# Altium PCB PCB4.PcbDoc (part 1 of 7)
Units mm, origin at the board's own origin, x right, y up, seen from the top; angles counter-clockwise.
Board outline 234.9 x 198.3 mm, 4 copper layers (Top Layer, Signal Layer 2, Mid, Bottom Layer), stack 3.052 mm thick; 410 components, 320 nets, 2032 pads, 297 vias.
Unrouted connection lines stored in the file: 1.
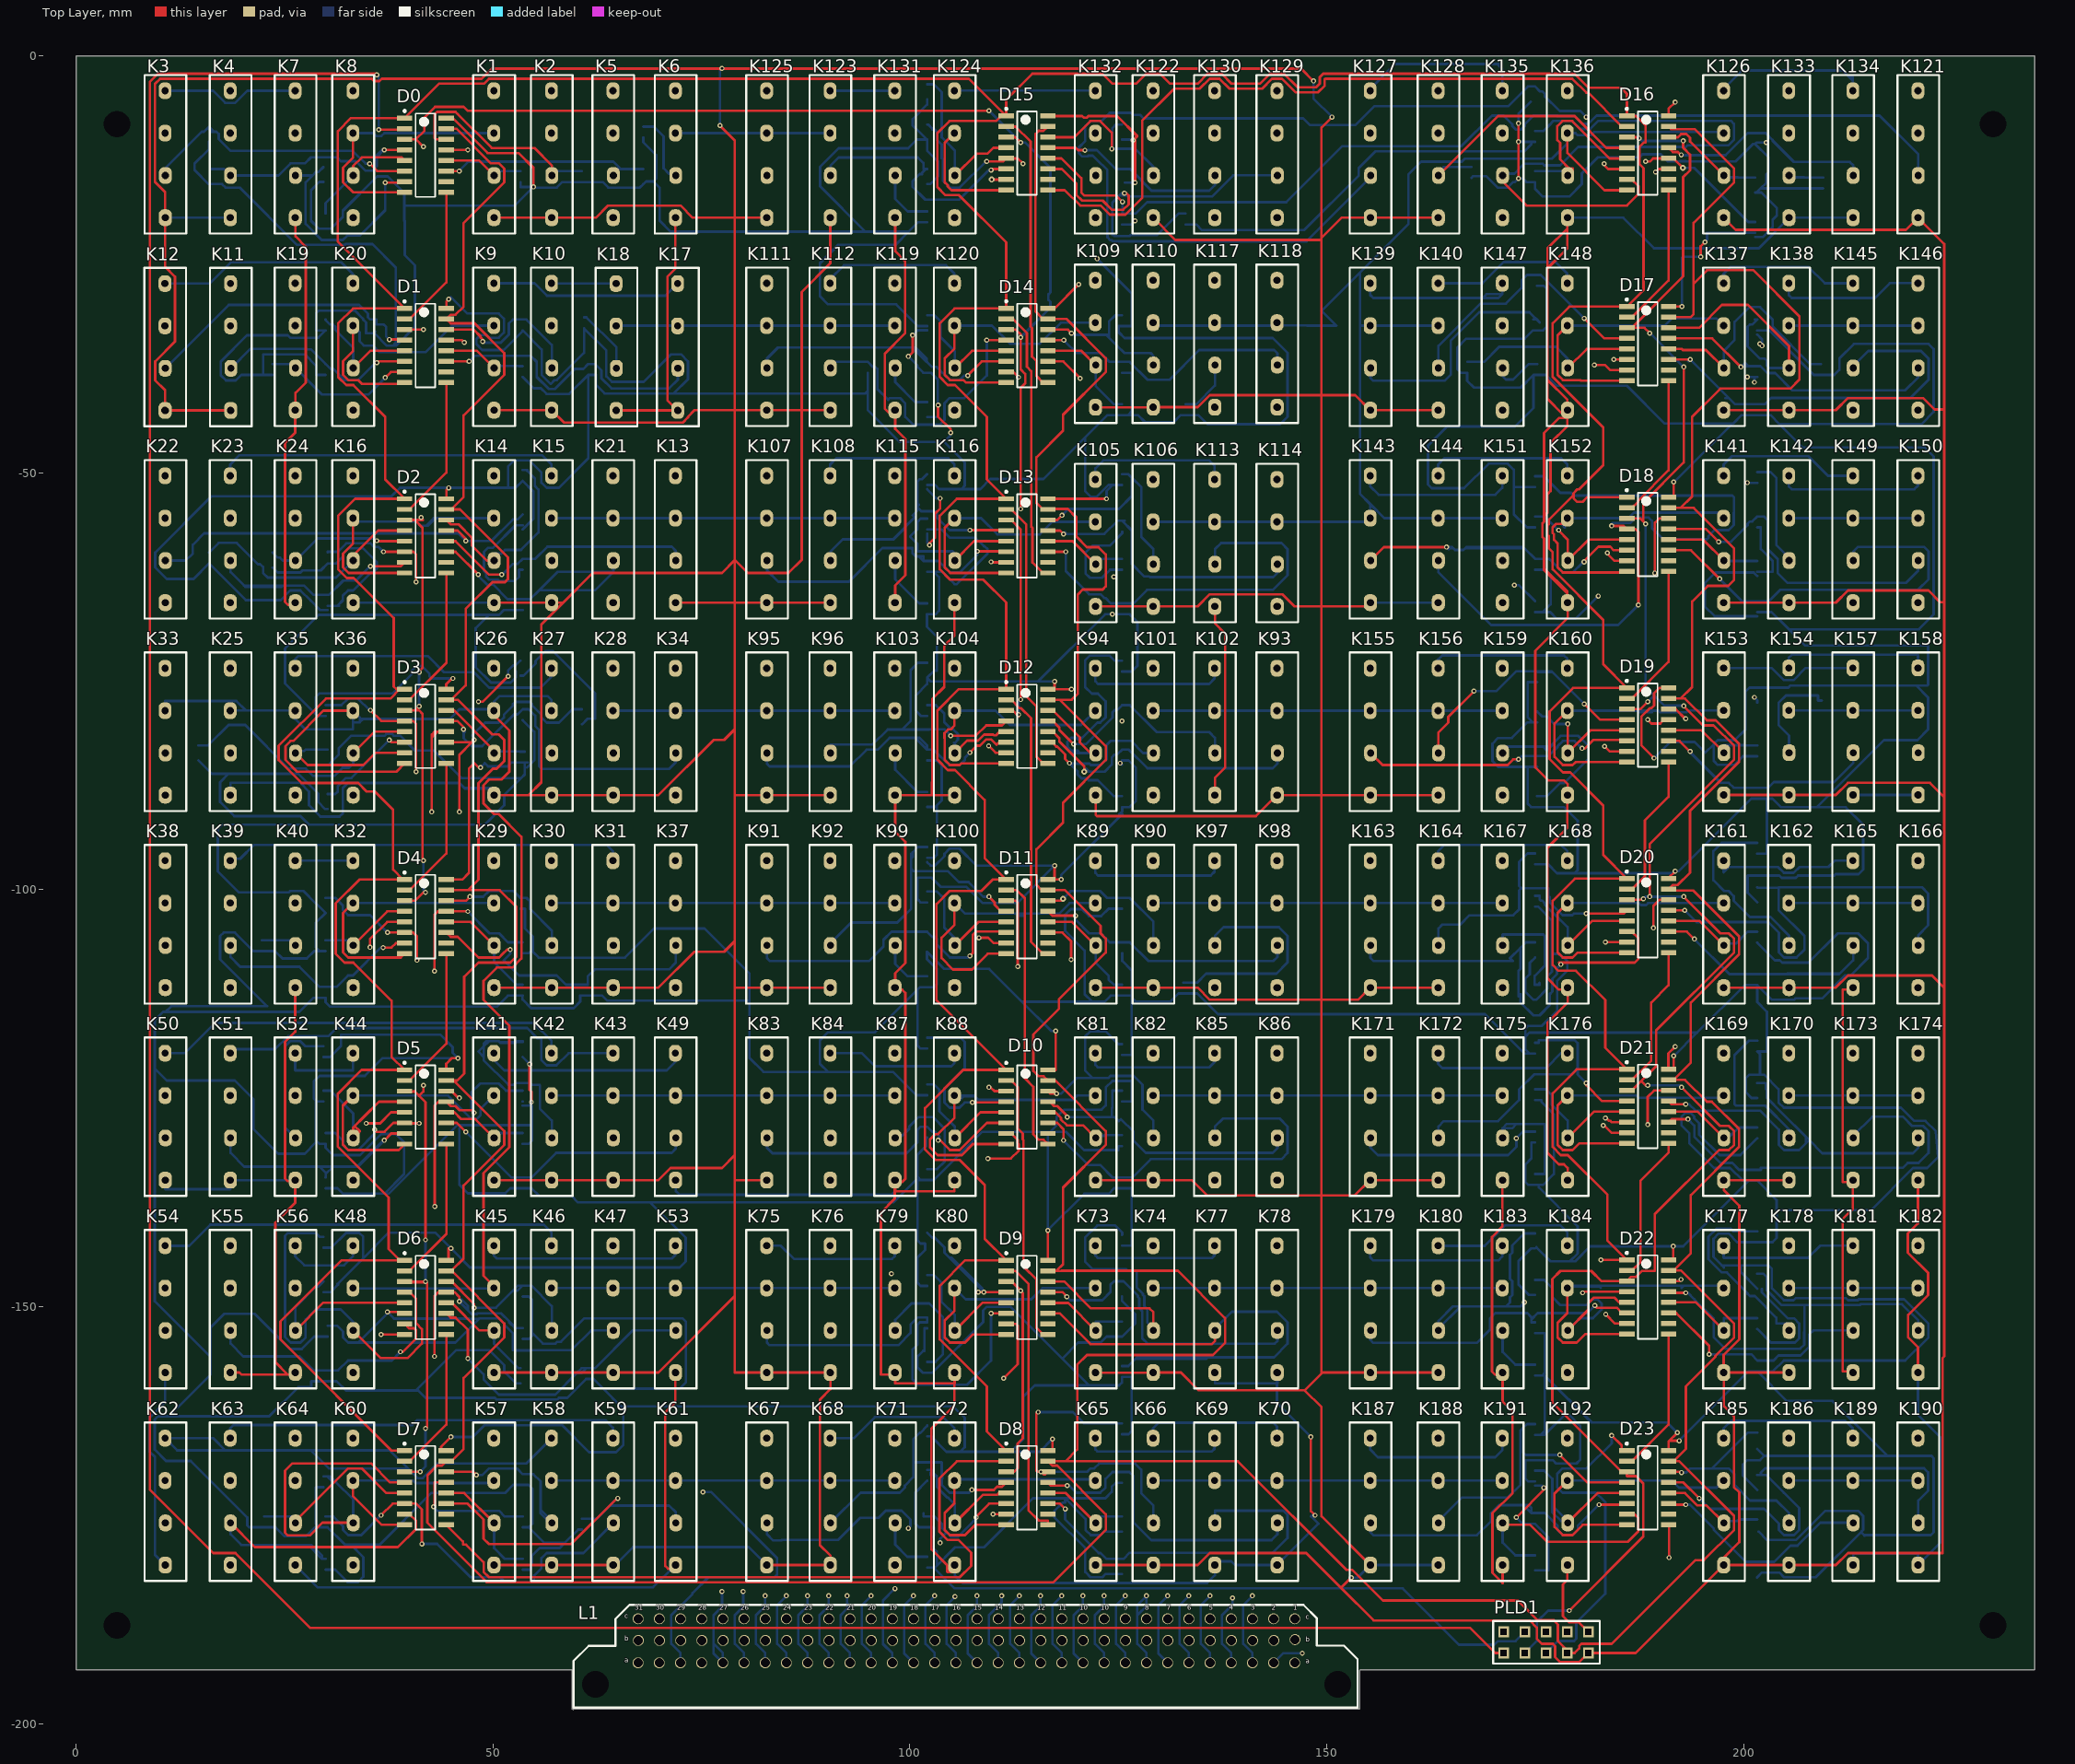
[diagram p0: Top Layer view]
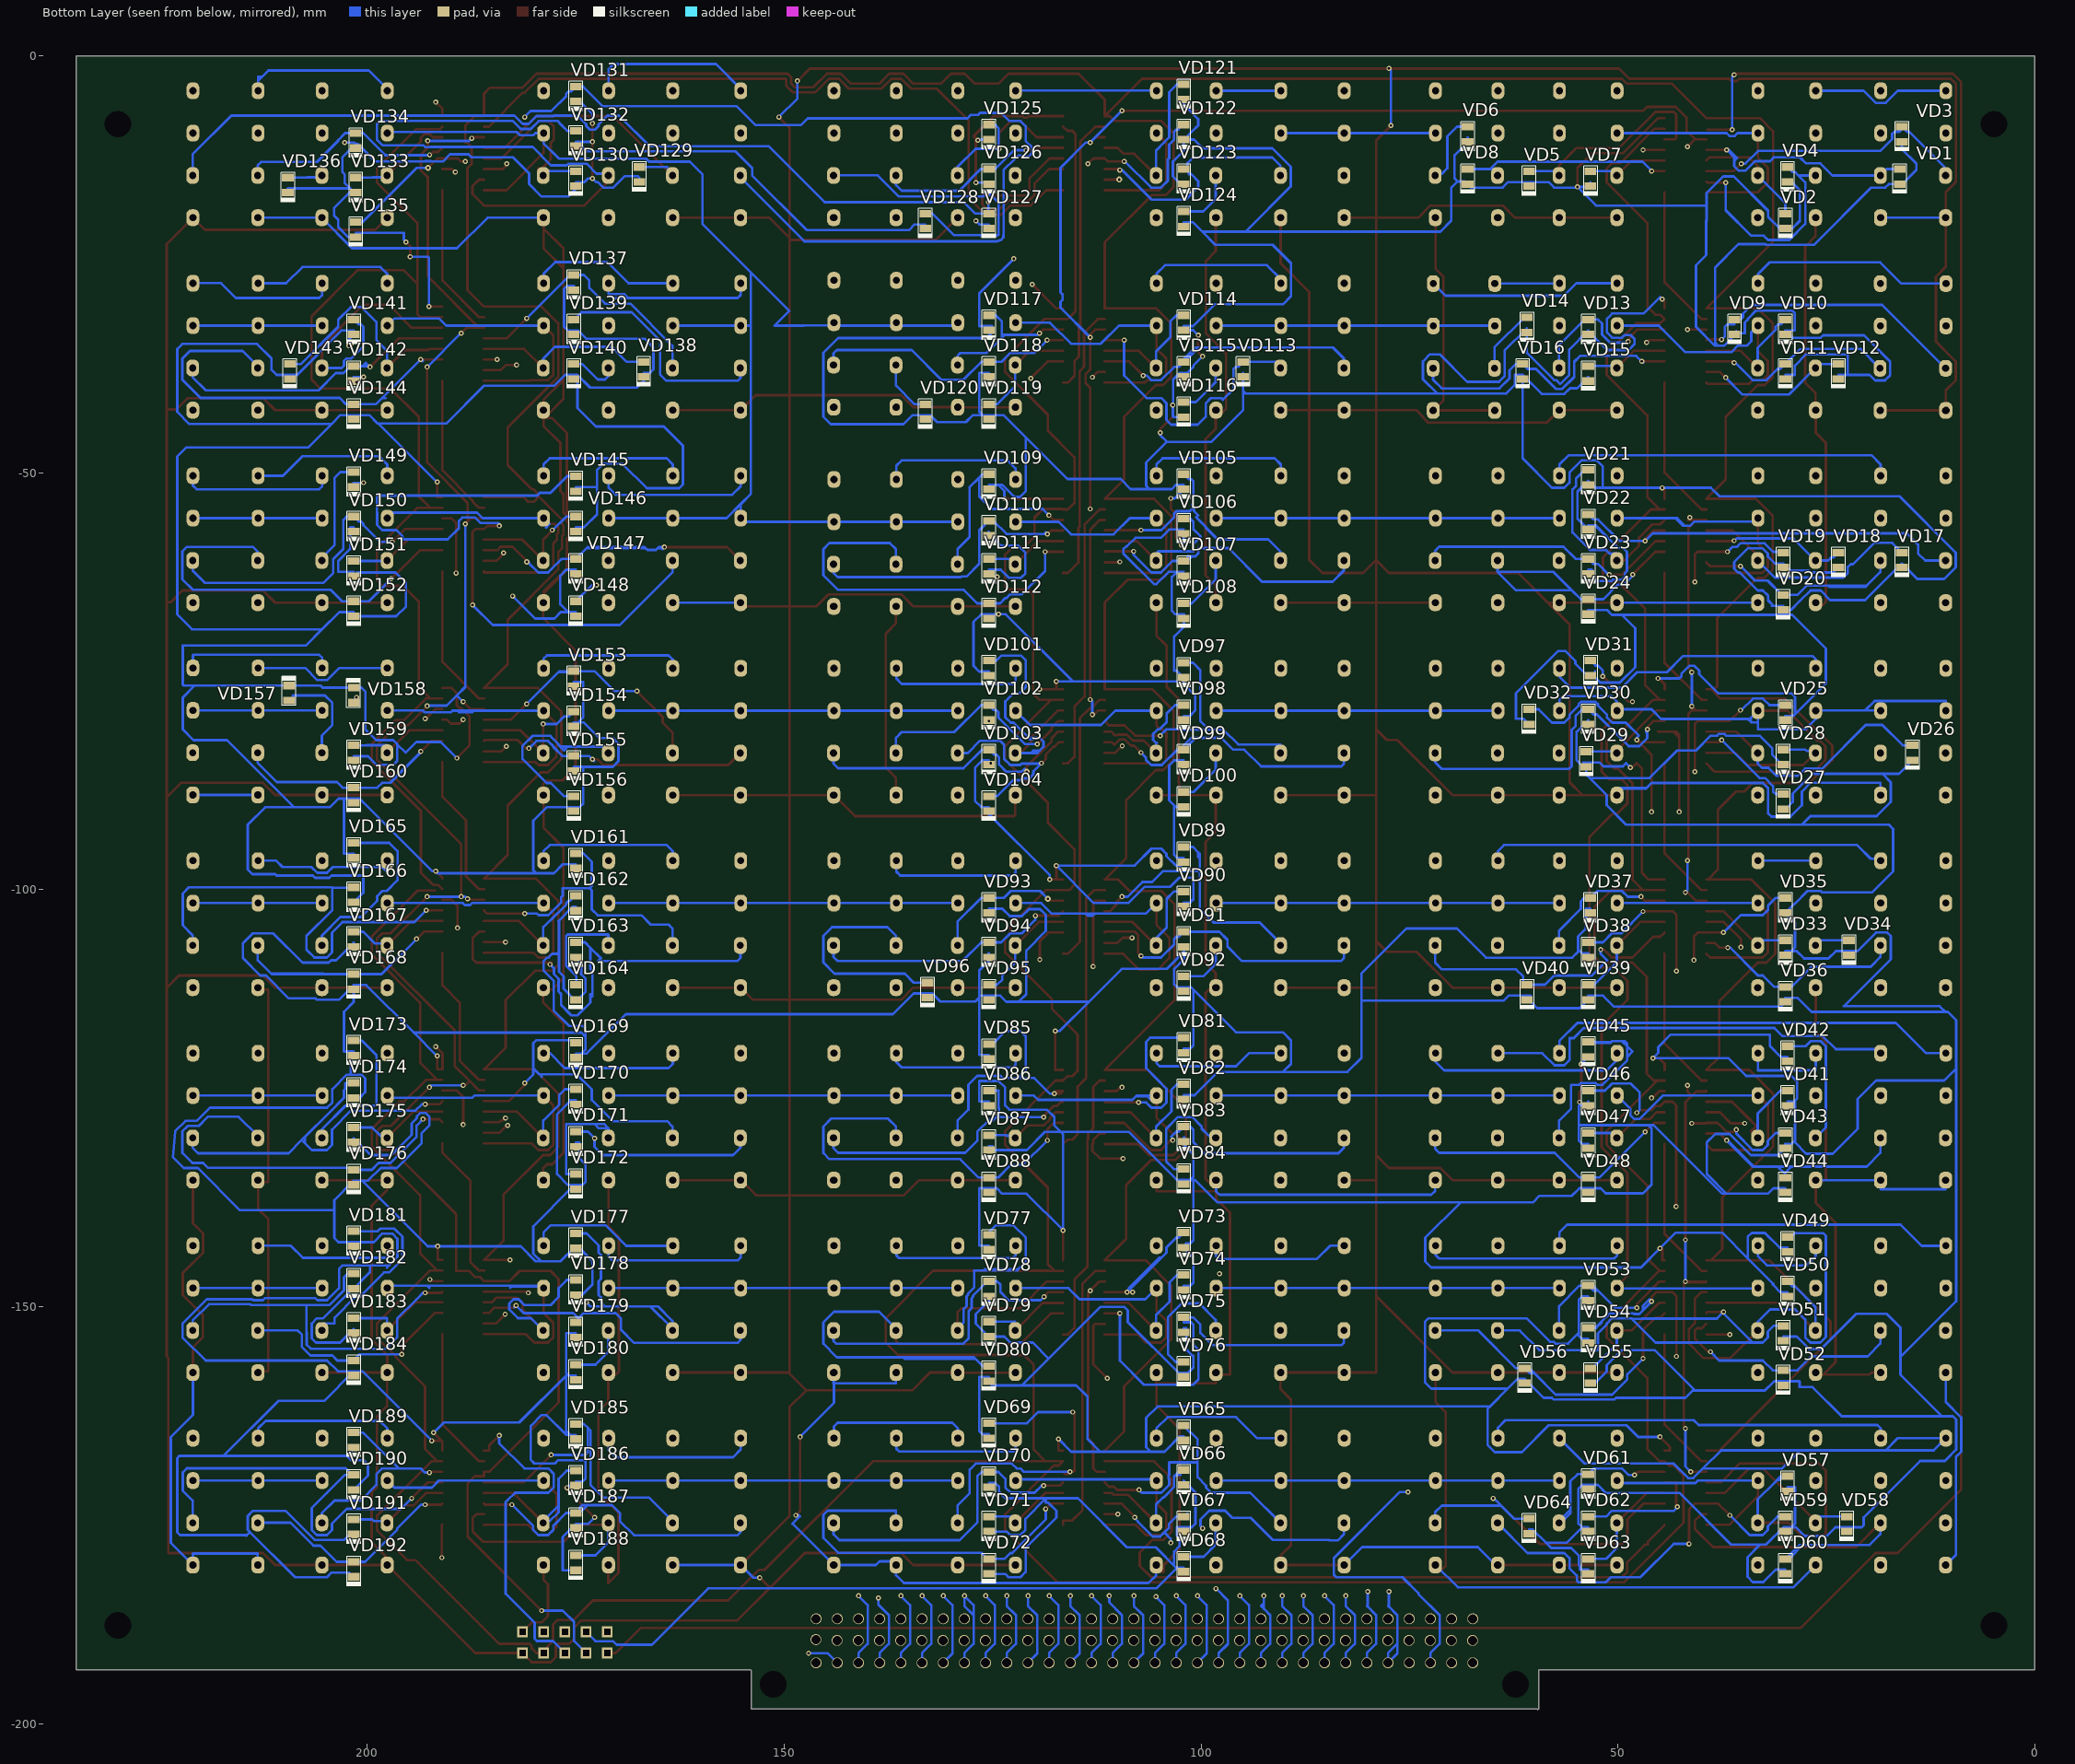
[diagram p1: Bottom Layer view, seen from below]
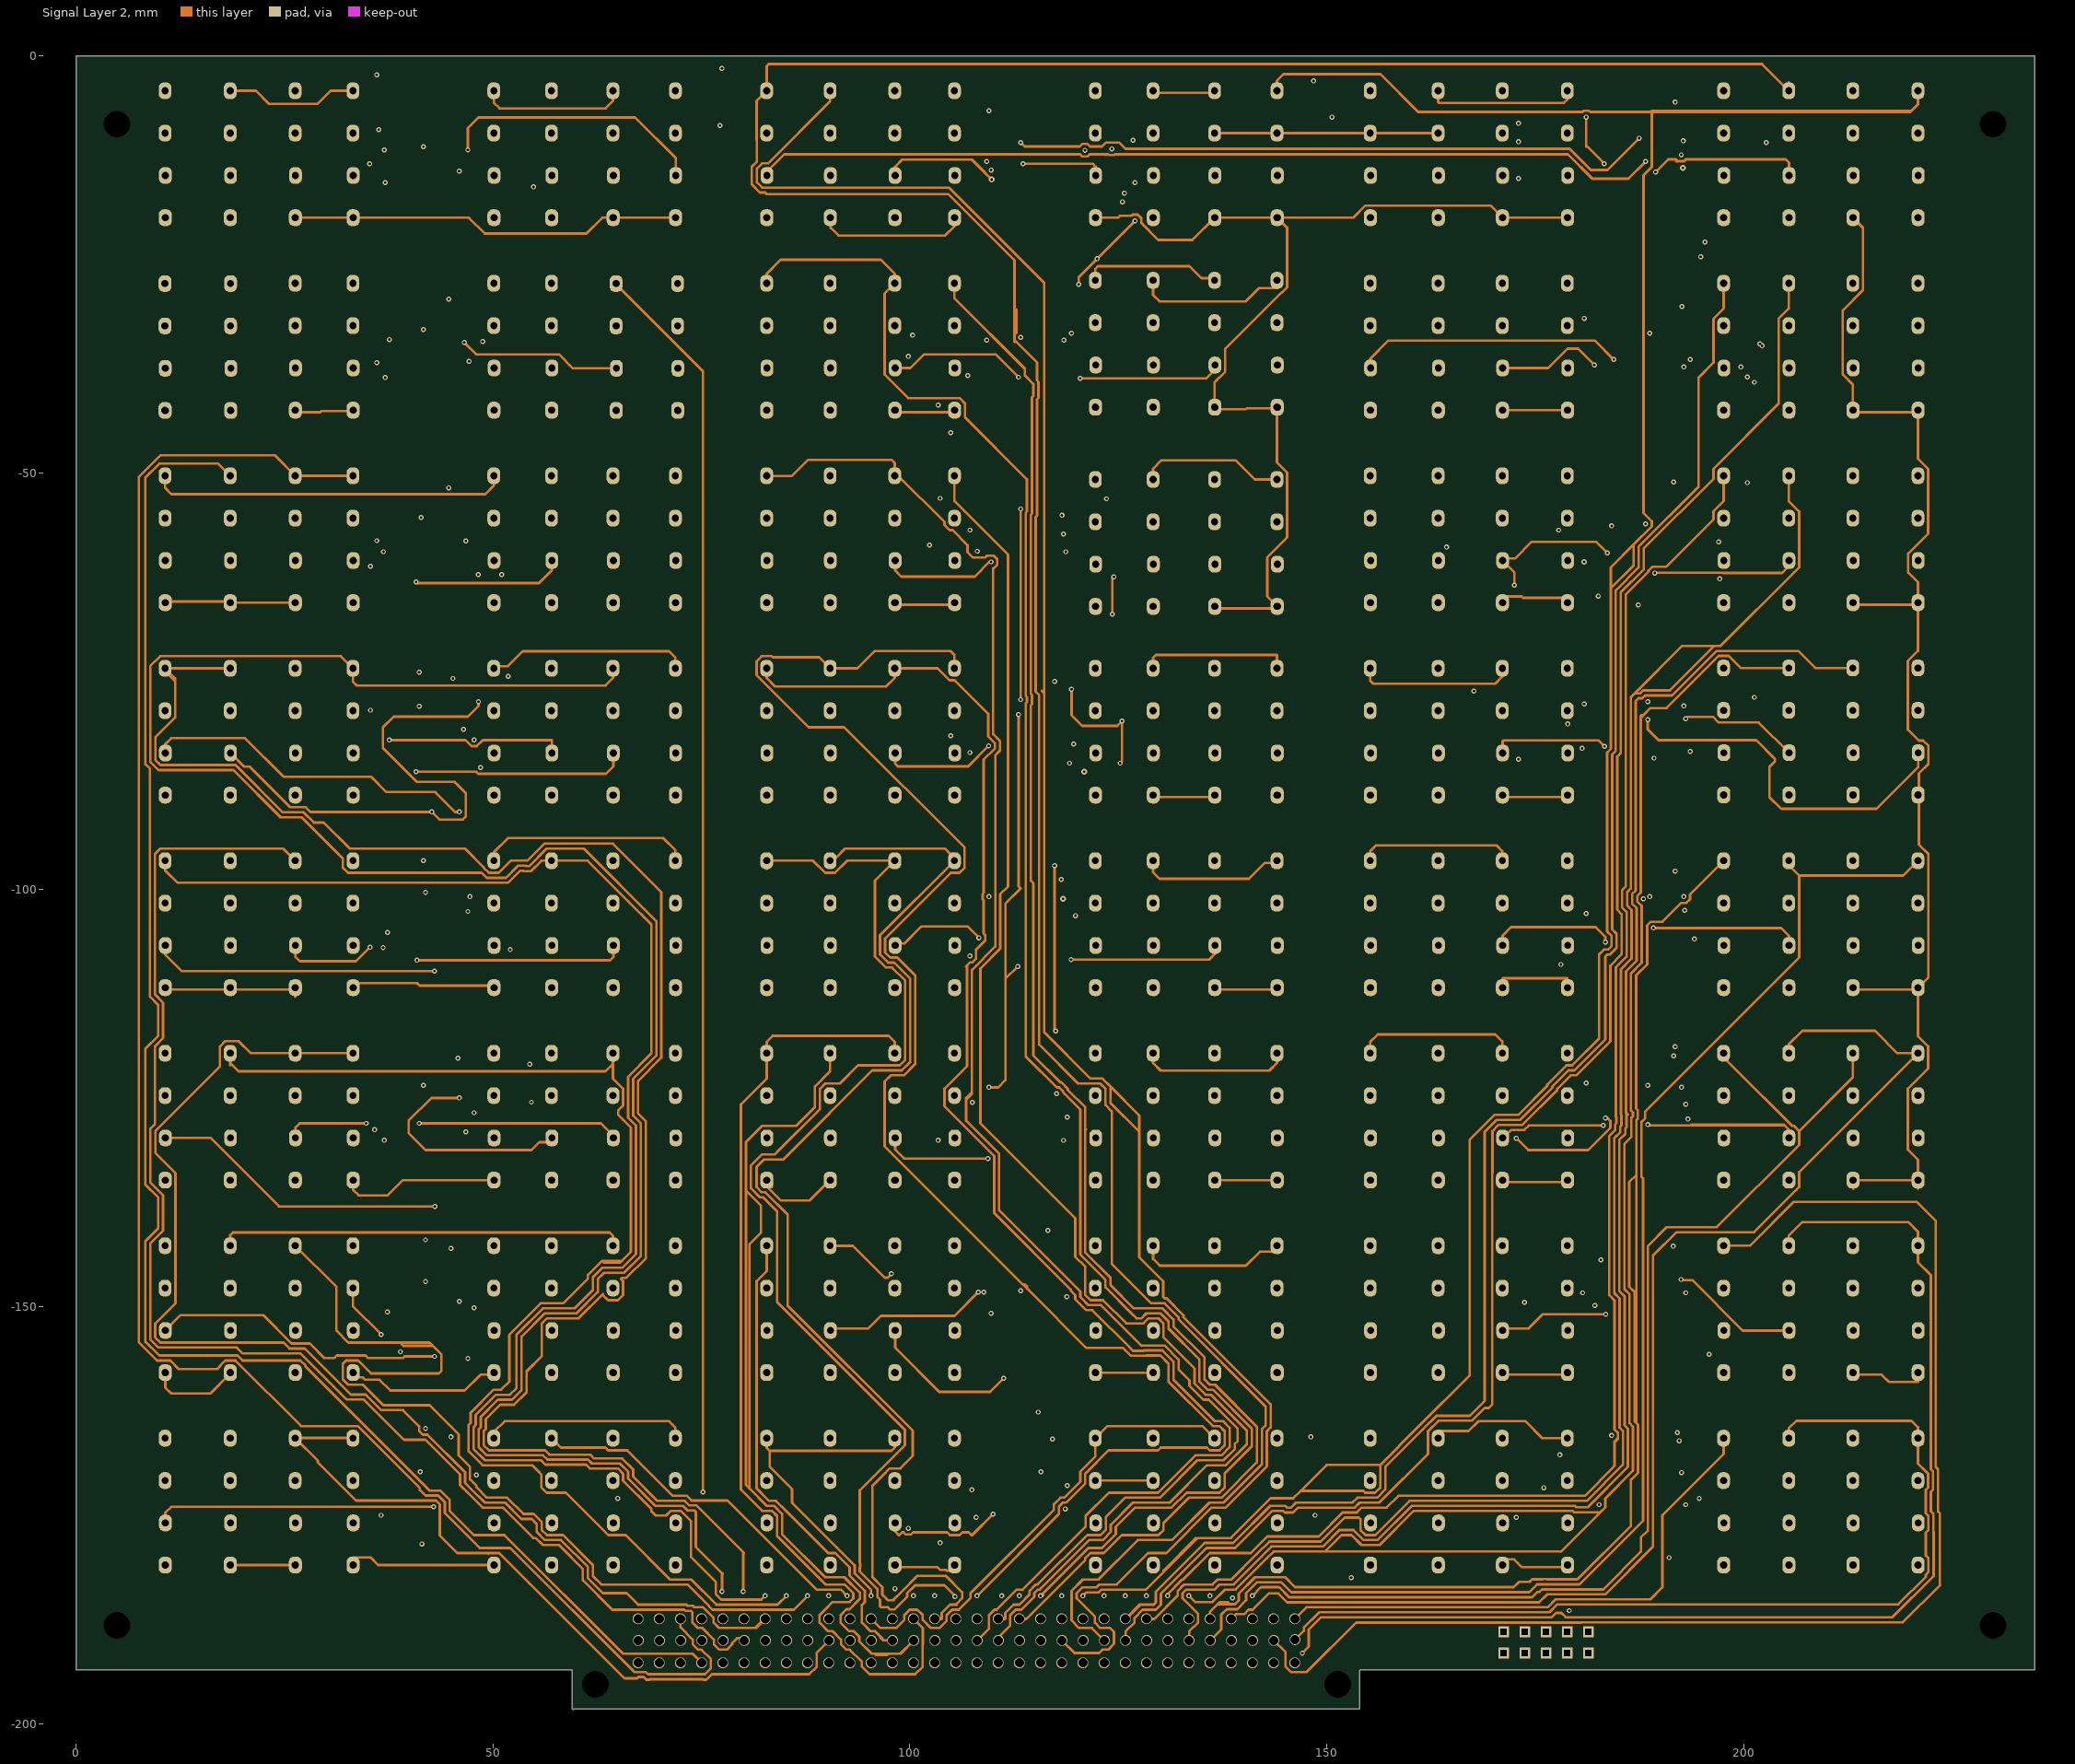
[diagram p2: Signal Layer 2]
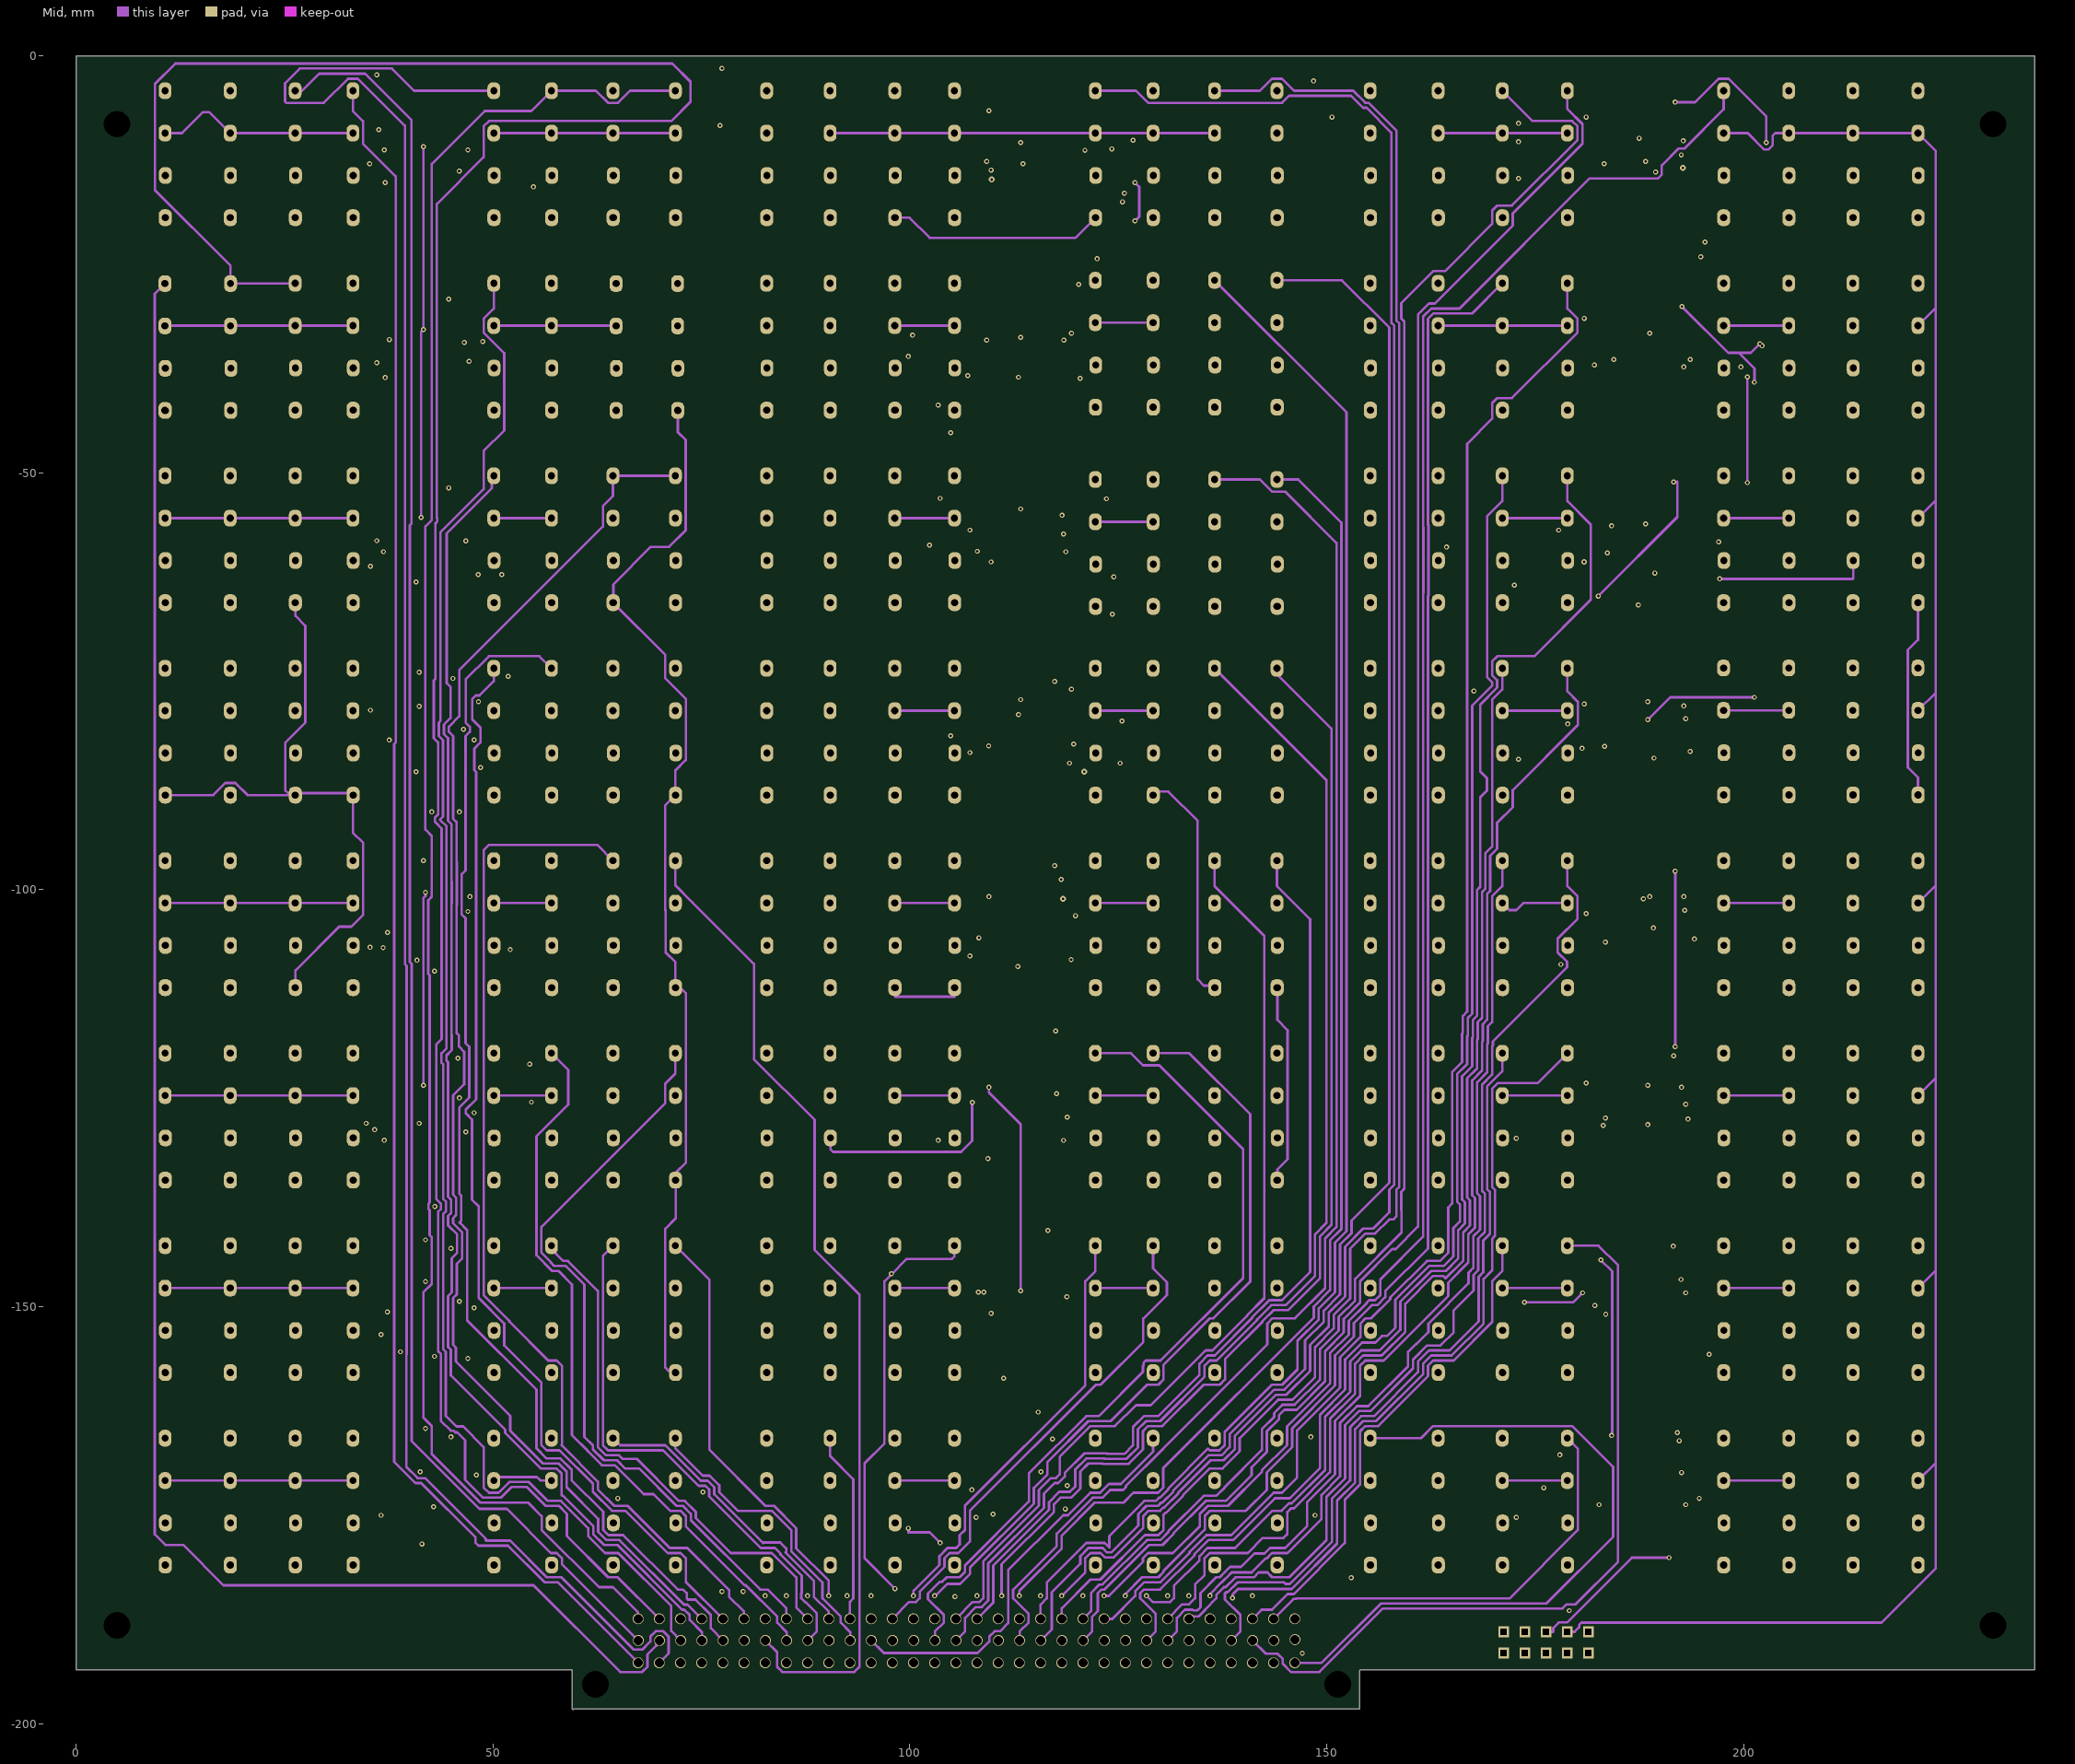
[diagram p3: Mid]

## Layer stack, top to bottom
Top Solder: solder mask 0.0102, Solder Resist, Dk 3.5
Top Layer: signal copper 0.036
Dielectric 1: core 0.8, FR-4 DE 104 ML, Dk 4.2
Dielectric 4: prepreg 0.127, Prepreg 2116PL03, Dk 4.2
Dielectric 6: prepreg 0.127, Prepreg 2116PL03, Dk 4.2
Signal Layer 2: signal copper 0.036
Dielectric 5: core 0.8, FR-4 DE 104 ML, Dk 4.2
Mid: signal copper 0.036
Dielectric 7: prepreg 0.127, Prepreg 2116PL03, Dk 4.2
Dielectric 8: prepreg 0.127, Prepreg 2116PL03, Dk 4.2
Dielectric 2: core 0.8, FR-4 DE 104 ML, Dk 4.2
Bottom Layer: signal copper 0.036
Bottom Solder: solder mask 0.0102, Solder Resist, Dk 3.5

## Board outline
0,-193.5 59.5,-193.5 59.5,-198.2 59.6,-198.3 59.7,-198.2 153.9,-198.2 153.9,-193.6 154,-193.5 234.9,-193.5 234.9,0 0,0

## Design rules (kind name [scope] priority, off if disabled: settings)
Clearance [All] p1: gap=0.3
PolygonConnect [All] p1: connectstyle=Relief reliefconductorwidth=0.254 reliefentries=4 polygonreliefangle="90 Angle" airgapwidth=0.254
RoutingCorners [All] p1: cornerstyle=45-Degree minsetback=3 maxsetback=3
RoutingVias [All] p1: holewidth=0.3 width=0.6 viastyle="Through Hole" minholewidth=0.3 minwidth=0.6 maxholewidth=0.3 maxwidth=0.6
SolderMaskExpansion [All] p1: expansion=0.002
Width [All] p1: maxlimit=0.3 minlimit=0.3 preferedwidth=0.3
28 further rules are at their usual default settings.

## Components (designator, comment, footprint, x,y, rotation, side; value= is the part's Value field where it differs from the comment)
D0 "" SOP127P600X175-16N 41.908,-11.921 r0 top
D1 "" SOP127P600X175-16N 41.907,-34.744 r0 top
D2 "" SOP127P600X175-16N 41.908,-57.568 r0 top
D3 "" SOP127P600X175-16N 41.908,-80.392 r0 top
D4 "" SOP127P600X175-16N 41.908,-103.215 r0 top
D5 "" SOP127P600X175-16N 41.908,-126.039 r0 top
D6 "" SOP127P600X175-16N 41.908,-148.863 r0 top
D7 "" SOP127P600X175-16N 41.908,-171.687 r0 top
D8 "" SOP127P600X175-16N 114.043,-171.687 r0 top
D9 "" SOP127P600X175-16N 114.043,-148.863 r0 top
D10 "" SOP127P600X175-16N 114.043,-126.039 r0 top
D11 "" SOP127P600X175-16N 114.043,-103.215 r0 top
D12 "" SOP127P600X175-16N 114.043,-80.392 r0 top
D13 "" SOP127P600X175-16N 114.043,-57.568 r0 top
D14 "" SOP127P600X175-16N 114.043,-34.744 r0 top
D15 "" SOP127P600X175-16N 114.043,-11.667 r0 top
D16 "" SOP127P600X175-16N 188.466,-11.667 r0 top
D17 "" SOP127P600X175-16N 188.466,-34.527 r0 top
D18 "" SOP127P600X175-16N 188.466,-57.387 r0 top
D19 "" SOP127P600X175-16N 188.466,-80.247 r0 top
D20 "" SOP127P600X175-16N 188.466,-103.107 r0 top
D21 "" SOP127P600X175-16N 188.466,-125.966 r0 top
D22 "" SOP127P600X175-16N 188.466,-148.827 r0 top
D23 "" SOP127P600X175-16N 188.466,-171.687 r0 top
K1 "" TTR-реле 52.639,-21.319 r90 top
K2 "" TTR-реле 59.561,-21.319 r90 top
K3 "" TTR-реле 13.221,-21.319 r90 top
K4 "" TTR-реле 21.031,-21.319 r90 top
K5 "" TTR-реле 66.935,-21.319 r90 top
K6 "" TTR-реле 74.419,-21.319 r90 top
K7 "" TTR-реле 28.827,-21.319 r90 top
K8 "" TTR-реле 35.748,-21.319 r90 top
K9 "" TTR-реле 52.639,-44.396 r90 top
K10 "" TTR-реле 59.561,-44.396 r90 top
K11 "" TTR-реле 21.08,-44.433 r90 top
K12 "" TTR-реле 13.206,-44.433 r90 top
K13 "" TTR-реле 74.419,-67.474 r90 top
K14 "" TTR-реле 52.639,-67.474 r90 top
K15 "" TTR-реле 59.561,-67.474 r90 top
K16 "" TTR-реле 35.748,-67.474 r90 top
K17 "" TTR-реле 74.674,-44.433 r90 top
K18 "" TTR-реле 67.308,-44.433 r90 top
K19 "" TTR-реле 28.827,-44.396 r90 top
K20 "" TTR-реле 35.748,-44.396 r90 top
K21 "" TTR-реле 66.935,-67.474 r90 top
K22 "" TTR-реле 13.221,-67.474 r90 top
K23 "" TTR-реле 21.031,-67.474 r90 top
K24 "" TTR-реле 28.827,-67.474 r90 top
K25 "" TTR-реле 21.031,-90.552 r90 top
K26 "" TTR-реле 52.639,-90.552 r90 top
K27 "" TTR-реле 59.56,-90.552 r90 top
K28 "" TTR-реле 66.935,-90.552 r90 top
K29 "" TTR-реле 52.639,-113.629 r90 top
K30 "" TTR-реле 59.561,-113.629 r90 top
K31 "" TTR-реле 66.935,-113.629 r90 top
K32 "" TTR-реле 35.748,-113.629 r90 top
K33 "" TTR-реле 13.221,-90.552 r90 top
K34 "" TTR-реле 74.42,-90.552 r90 top
K35 "" TTR-реле 28.827,-90.552 r90 top
K36 "" TTR-реле 35.748,-90.552 r90 top
K37 "" TTR-реле 74.42,-113.629 r90 top
K38 "" TTR-реле 13.221,-113.629 r90 top
K39 "" TTR-реле 21.031,-113.629 r90 top
K40 "" TTR-реле 28.827,-113.629 r90 top
K41 "" TTR-реле 52.639,-136.707 r90 top
K42 "" TTR-реле 59.561,-136.707 r90 top
K43 "" TTR-реле 66.935,-136.707 r90 top
K44 "" TTR-реле 35.748,-136.707 r90 top
K45 "" TTR-реле 52.639,-159.785 r90 top
K46 "" TTR-реле 59.561,-159.785 r90 top
K47 "" TTR-реле 66.935,-159.785 r90 top
K48 "" TTR-реле 35.748,-159.785 r90 top
K49 "" TTR-реле 74.42,-136.707 r90 top
K50 "" TTR-реле 13.221,-136.707 r90 top
K51 "" TTR-реле 21.031,-136.707 r90 top
K52 "" TTR-реле 28.827,-136.707 r90 top
K53 "" TTR-реле 74.42,-159.785 r90 top
K54 "" TTR-реле 13.221,-159.785 r90 top
K55 "" TTR-реле 21.031,-159.785 r90 top
K56 "" TTR-реле 28.827,-159.785 r90 top
K57 "" TTR-реле 52.639,-182.863 r90 top
K58 "" TTR-реле 59.561,-182.863 r90 top
K59 "" TTR-реле 66.935,-182.863 r90 top
K60 "" TTR-реле 35.748,-182.863 r90 top
K61 "" TTR-реле 74.42,-182.863 r90 top
K62 "" TTR-реле 13.221,-182.863 r90 top
K63 "" TTR-реле 21.031,-182.863 r90 top
K64 "" TTR-реле 28.827,-182.863 r90 top
K65 "" TTR-реле 124.775,-182.863 r90 top
K66 "" TTR-реле 131.697,-182.863 r90 top
K67 "" TTR-реле 85.357,-182.863 r90 top
K68 "" TTR-реле 92.962,-182.863 r90 top
K69 "" TTR-реле 139.071,-182.863 r90 top
K70 "" TTR-реле 146.556,-182.863 r90 top
K71 "" TTR-реле 100.723,-182.863 r90 top
K72 "" TTR-реле 107.884,-182.863 r90 top
K73 "" TTR-реле 124.775,-159.785 r90 top
K74 "" TTR-реле 131.697,-159.785 r90 top
K75 "" TTR-реле 85.357,-159.785 r90 top
K76 "" TTR-реле 92.962,-159.785 r90 top
K77 "" TTR-реле 139.071,-159.785 r90 top
K78 "" TTR-реле 146.556,-159.785 r90 top
K79 "" TTR-реле 100.723,-159.785 r90 top
K80 "" TTR-реле 107.884,-159.785 r90 top
K81 "" TTR-реле 124.775,-136.707 r90 top
K82 "" TTR-реле 131.697,-136.707 r90 top
K83 "" TTR-реле 85.357,-136.707 r90 top
K84 "" TTR-реле 92.962,-136.707 r90 top
K85 "" TTR-реле 139.071,-136.707 r90 top
K86 "" TTR-реле 146.556,-136.707 r90 top
K87 "" TTR-реле 100.723,-136.707 r90 top
K88 "" TTR-реле 107.884,-136.707 r90 top
K89 "" TTR-реле 124.775,-113.629 r90 top
K90 "" TTR-реле 131.697,-113.629 r90 top
K91 "" TTR-реле 85.357,-113.629 r90 top
K92 "" TTR-реле 92.962,-113.629 r90 top
K93 "" TTR-реле 146.556,-90.552 r90 top
K94 "" TTR-реле 124.775,-90.552 r90 top
K95 "" TTR-реле 85.357,-90.552 r90 top
K96 "" TTR-реле 92.962,-90.552 r90 top
K97 "" TTR-реле 139.071,-113.629 r90 top
K98 "" TTR-реле 146.556,-113.629 r90 top
K99 "" TTR-реле 100.723,-113.629 r90 top
K100 "" TTR-реле 107.884,-113.629 r90 top
K101 "" TTR-реле 131.697,-90.552 r90 top
K102 "" TTR-реле 139.071,-90.552 r90 top
K103 "" TTR-реле 100.723,-90.552 r90 top
K104 "" TTR-реле 107.884,-90.552 r90 top
K105 "" TTR-реле 124.775,-67.92 r90 top
K106 "" TTR-реле 131.697,-67.92 r90 top
K107 "" TTR-реле 85.357,-67.474 r90 top
K108 "" TTR-реле 92.962,-67.474 r90 top
K109 "" TTR-реле 124.775,-44.044 r90 top
K110 "" TTR-реле 131.697,-44.044 r90 top
K111 "" TTR-реле 85.357,-44.396 r90 top
K112 "" TTR-реле 92.962,-44.396 r90 top
K113 "" TTR-реле 139.071,-67.92 r90 top
K114 "" TTR-реле 146.556,-67.92 r90 top
K115 "" TTR-реле 100.723,-67.474 r90 top
K116 "" TTR-реле 107.884,-67.474 r90 top
K117 "" TTR-реле 139.071,-44.044 r90 top
K118 "" TTR-реле 146.556,-44.044 r90 top
K119 "" TTR-реле 100.723,-44.396 r90 top
K120 "" TTR-реле 107.884,-44.396 r90 top
K121 "" TTR-реле 223.413,-21.319 r90 top
K122 "" TTR-реле 131.697,-21.319 r90 top
K123 "" TTR-реле 92.962,-21.319 r90 top
K124 "" TTR-реле 107.884,-21.319 r90 top
K125 "" TTR-реле 85.357,-21.319 r90 top
K126 "" TTR-реле 200.107,-21.319 r90 top
K127 "" TTR-реле 157.732,-21.319 r90 top
K128 "" TTR-реле 165.879,-21.319 r90 top
K129 "" TTR-реле 146.556,-21.319 r90 top
K130 "" TTR-реле 139.071,-21.319 r90 top
K131 "" TTR-реле 100.723,-21.319 r90 top
K132 "" TTR-реле 124.775,-21.319 r90 top
K133 "" TTR-реле 207.917,-21.319 r90 top
K134 "" TTR-реле 215.603,-21.319 r90 top
K135 "" TTR-реле 173.565,-21.319 r90 top
K136 "" TTR-реле 181.375,-21.319 r90 top
K137 "" TTR-реле 200.107,-44.396 r90 top
K138 "" TTR-реле 207.917,-44.396 r90 top
K139 "" TTR-реле 157.732,-44.396 r90 top
K140 "" TTR-реле 165.879,-44.396 r90 top
K141 "" TTR-реле 200.107,-67.474 r90 top
K142 "" TTR-реле 207.917,-67.474 r90 top
K143 "" TTR-реле 157.732,-67.474 r90 top
K144 "" TTR-реле 165.879,-67.474 r90 top
K145 "" TTR-реле 215.603,-44.396 r90 top
K146 "" TTR-реле 223.413,-44.396 r90 top
K147 "" TTR-реле 173.565,-44.396 r90 top
K148 "" TTR-реле 181.375,-44.396 r90 top
K149 "" TTR-реле 215.603,-67.474 r90 top
K150 "" TTR-реле 223.413,-67.474 r90 top
K151 "" TTR-реле 173.565,-67.474 r90 top
K152 "" TTR-реле 181.375,-67.474 r90 top
K153 "" TTR-реле 200.107,-90.526 r90 top
K154 "" TTR-реле 207.917,-90.526 r90 top
K155 "" TTR-реле 157.732,-90.552 r90 top
K156 "" TTR-реле 165.879,-90.552 r90 top
K157 "" TTR-реле 215.603,-90.526 r90 top
K158 "" TTR-реле 223.413,-90.526 r90 top
K159 "" TTR-реле 173.565,-90.552 r90 top
K160 "" TTR-реле 181.375,-90.552 r90 top
K161 "" TTR-реле 200.107,-113.629 r90 top
K162 "" TTR-реле 207.917,-113.629 r90 top
K163 "" TTR-реле 157.732,-113.629 r90 top
K164 "" TTR-реле 165.879,-113.629 r90 top
K165 "" TTR-реле 215.603,-113.629 r90 top
K166 "" TTR-реле 223.413,-113.629 r90 top
K167 "" TTR-реле 173.565,-113.629 r90 top
K168 "" TTR-реле 181.375,-113.629 r90 top
K169 "" TTR-реле 200.107,-136.707 r90 top
K170 "" TTR-реле 207.917,-136.707 r90 top
K171 "" TTR-реле 157.732,-136.707 r90 top
K172 "" TTR-реле 165.879,-136.707 r90 top
K173 "" TTR-реле 215.603,-136.707 r90 top
K174 "" TTR-реле 223.413,-136.707 r90 top
K175 "" TTR-реле 173.565,-136.707 r90 top
K176 "" TTR-реле 181.375,-136.707 r90 top
K177 "" TTR-реле 200.107,-159.785 r90 top
K178 "" TTR-реле 207.917,-159.785 r90 top
K179 "" TTR-реле 157.732,-159.785 r90 top
K180 "" TTR-реле 165.879,-159.785 r90 top
K181 "" TTR-реле 215.603,-159.785 r90 top
K182 "" TTR-реле 223.413,-159.785 r90 top
K183 "" TTR-реле 173.565,-159.785 r90 top
K184 "" TTR-реле 181.375,-159.785 r90 top
K185 "" TTR-реле 200.107,-182.863 r90 top
K186 "" TTR-реле 207.917,-182.863 r90 top
K187 "" TTR-реле 157.732,-182.863 r90 top
K188 "" TTR-реле 165.879,-182.863 r90 top
K189 "" TTR-реле 215.603,-182.863 r90 top
K190 "" TTR-реле 223.413,-182.863 r90 top
K191 "" TTR-реле 173.565,-182.863 r90 top
K192 "" TTR-реле 181.375,-182.863 r90 top
L1 "DIN 41612" DIN41612 154.176,-184.64 r180 top
PLD1 "PLD 10" "PLD 10" 169.924,-192.769 r0 top
VD1 "BAS216" BAS216+ 17.016,-13.191 r270 bottom
VD2 "BAS216" BAS216+ 30.732,-18.525 r270 bottom
VD3 "BAS216" BAS216+ 16.762,-8.111 r270 bottom
VD4 "BAS216" BAS216+ 30.478,-12.937 r270 bottom
VD5 "BAS216" BAS216+ 61.466,-13.445 r270 bottom
VD6 "BAS216" BAS216+ 68.832,-8.111 r270 bottom
VD7 "BAS216" BAS216+ 54.1,-13.445 r270 bottom
VD8 "BAS216" BAS216+ 68.832,-13.191 r270 bottom
VD9 "BAS216" BAS216+ 36.828,-31.225 r270 bottom
VD10 "BAS216" BAS216+ 30.732,-31.225 r270 bottom
VD11 "BAS216" BAS216+ 30.732,-36.559 r270 bottom
VD12 "BAS216" BAS216+ 24.382,-36.559 r270 bottom
VD13 "BAS216" BAS216+ 54.354,-31.225 r270 bottom
VD14 "BAS216" BAS216+ 61.72,-30.971 r270 bottom
VD15 "BAS216" BAS216+ 54.354,-36.813 r270 bottom
VD16 "BAS216" BAS216+ 62.228,-36.559 r270 bottom
VD17 "BAS216" BAS216+ 16.762,-59.165 r270 bottom
VD18 "BAS216" BAS216+ 24.382,-59.165 r270 bottom
VD19 "BAS216" BAS216+ 30.986,-59.165 r270 bottom
VD20 "BAS216" BAS216+ 30.986,-64.245 r270 bottom
VD21 "BAS216" BAS216+ 54.354,-49.259 r270 bottom
VD22 "BAS216" BAS216+ 54.354,-54.593 r270 bottom
VD23 "BAS216" BAS216+ 54.354,-59.927 r270 bottom
VD24 "BAS216" BAS216+ 54.354,-64.753 r270 bottom
VD25 "BAS216" BAS216+ 30.732,-77.453 r270 bottom
VD26 "BAS216" BAS216+ 15.492,-82.279 r270 bottom
VD27 "BAS216" BAS216+ 30.986,-88.121 r270 bottom
VD28 "BAS216" BAS216+ 30.986,-82.787 r270 bottom
VD29 "BAS216" BAS216+ 54.608,-83.041 r270 bottom
VD30 "BAS216" BAS216+ 54.354,-77.961 r270 bottom
VD31 "BAS216" BAS216+ 54.1,-72.119 r270 bottom
VD32 "BAS216" BAS216+ 61.466,-77.961 r270 bottom
VD33 "BAS216" BAS216+ 30.732,-105.647 r270 bottom
VD34 "BAS216" BAS216+ 23.112,-105.647 r270 bottom
VD35 "BAS216" BAS216+ 30.732,-100.567 r270 bottom
VD36 "BAS216" BAS216+ 30.732,-111.235 r270 bottom
VD37 "BAS216" BAS216+ 54.1,-100.567 r270 bottom
VD38 "BAS216" BAS216+ 54.354,-105.901 r270 bottom
VD39 "BAS216" BAS216+ 54.354,-110.981 r270 bottom
VD40 "BAS216" BAS216+ 61.72,-110.981 r270 bottom
VD41 "BAS216" BAS216+ 30.478,-123.681 r270 bottom
VD42 "BAS216" BAS216+ 30.478,-118.347 r270 bottom
VD43 "BAS216" BAS216+ 30.732,-128.761 r270 bottom
VD44 "BAS216" BAS216+ 30.732,-134.095 r270 bottom
VD45 "BAS216" BAS216+ 54.354,-117.839 r270 bottom
VD46 "BAS216" BAS216+ 54.354,-123.681 r270 bottom
VD47 "BAS216" BAS216+ 54.354,-128.761 r270 bottom
VD48 "BAS216" BAS216+ 54.354,-134.095 r270 bottom
VD49 "BAS216" BAS216+ 30.478,-141.207 r270 bottom
VD50 "BAS216" BAS216+ 30.478,-146.541 r270 bottom
VD51 "BAS216" BAS216+ 30.986,-151.875 r270 bottom
VD52 "BAS216" BAS216+ 30.986,-157.209 r270 bottom
VD53 "BAS216" BAS216+ 54.354,-147.049 r270 bottom
VD54 "BAS216" BAS216+ 54.354,-152.129 r270 bottom
VD55 "BAS216" BAS216+ 54.1,-156.955 r270 bottom
VD56 "BAS216" BAS216+ 61.974,-156.955 r270 bottom
VD57 "BAS216" BAS216+ 30.478,-169.909 r270 bottom
VD58 "BAS216" BAS216+ 23.366,-174.735 r270 bottom
VD59 "BAS216" BAS216+ 30.732,-174.735 r270 bottom
VD60 "BAS216" BAS216+ 30.732,-179.815 r270 bottom
VD61 "BAS216" BAS216+ 54.354,-169.655 r270 bottom
VD62 "BAS216" BAS216+ 54.354,-174.735 r270 bottom
VD63 "BAS216" BAS216+ 54.354,-179.815 r270 bottom
VD64 "BAS216" BAS216+ 61.466,-174.989 r270 bottom
VD65 "BAS216" BAS216+ 102.868,-163.813 r270 bottom
VD66 "BAS216" BAS216+ 102.868,-169.147 r270 bottom
VD67 "BAS216" BAS216+ 102.868,-174.735 r270 bottom
VD68 "BAS216" BAS216+ 102.868,-179.561 r270 bottom
VD69 "BAS216" BAS216+ 126.235,-163.559 r270 bottom
VD70 "BAS216" BAS216+ 126.236,-169.401 r270 bottom
VD71 "BAS216" BAS216+ 126.236,-174.735 r270 bottom
VD72 "BAS216" BAS216+ 126.236,-179.815 r270 bottom
VD73 "BAS216" BAS216+ 102.868,-140.699 r270 bottom
VD74 "BAS216" BAS216+ 102.867,-145.779 r270 bottom
VD75 "BAS216" BAS216+ 102.868,-150.859 r270 bottom
VD76 "BAS216" BAS216+ 102.868,-156.193 r270 bottom
VD77 "BAS216" BAS216+ 126.235,-140.953 r270 bottom
VD78 "BAS216" BAS216+ 126.236,-146.541 r270 bottom
VD79 "BAS216" BAS216+ 126.235,-151.367 r270 bottom
VD80 "BAS216" BAS216+ 126.236,-156.701 r270 bottom
VD81 "BAS216" BAS216+ 102.868,-117.331 r270 bottom
VD82 "BAS216" BAS216+ 102.867,-122.919 r270 bottom
VD83 "BAS216" BAS216+ 102.868,-127.999 r270 bottom
VD84 "BAS216" BAS216+ 102.868,-133.079 r270 bottom
VD85 "BAS216" BAS216+ 126.236,-118.093 r270 bottom
VD86 "BAS216" BAS216+ 126.236,-123.681 r270 bottom
VD87 "BAS216" BAS216+ 126.235,-129.015 r270 bottom
VD88 "BAS216" BAS216+ 126.236,-134.095 r270 bottom
VD89 "BAS216" BAS216+ 102.868,-94.471 r270 bottom
VD90 "BAS216" BAS216+ 102.868,-99.805 r270 bottom
VD91 "BAS216" BAS216+ 102.868,-104.631 r270 bottom
VD92 "BAS216" BAS216+ 102.868,-109.965 r270 bottom
VD93 "BAS216" BAS216+ 126.235,-100.567 r270 bottom
VD94 "BAS216" BAS216+ 126.236,-105.901 r270 bottom
VD95 "BAS216" BAS216+ 126.236,-110.981 r270 bottom
VD96 "BAS216" BAS216+ 133.602,-110.727 r270 bottom
VD97 "BAS216" BAS216+ 102.868,-72.373 r270 bottom
VD98 "BAS216" BAS216+ 102.867,-77.453 r270 bottom
VD99 "BAS216" BAS216+ 102.868,-82.787 r270 bottom
VD100 "BAS216" BAS216+ 102.868,-87.867 r270 bottom
VD101 "BAS216" BAS216+ 126.235,-72.119 r270 bottom
VD102 "BAS216" BAS216+ 126.236,-77.453 r270 bottom
VD103 "BAS216" BAS216+ 126.235,-82.787 r270 bottom
VD104 "BAS216" BAS216+ 126.236,-88.375 r270 bottom
VD105 "BAS216" BAS216+ 102.868,-49.767 r270 bottom
VD106 "BAS216" BAS216+ 102.867,-55.101 r270 bottom
VD107 "BAS216" BAS216+ 102.868,-60.181 r270 bottom
VD108 "BAS216" BAS216+ 102.868,-65.261 r270 bottom
VD109 "BAS216" BAS216+ 126.236,-49.767 r270 bottom
VD110 "BAS216" BAS216+ 126.236,-55.355 r270 bottom
VD111 "BAS216" BAS216+ 126.235,-59.927 r270 bottom
VD112 "BAS216" BAS216+ 126.236,-65.261 r270 bottom
VD113 "BAS216" BAS216+ 95.756,-36.305 r270 bottom
VD114 "BAS216" BAS216+ 102.868,-30.717 r270 bottom
VD115 "BAS216" BAS216+ 102.868,-36.305 r270 bottom
VD116 "BAS216" BAS216+ 102.868,-41.131 r270 bottom
VD117 "BAS216" BAS216+ 126.235,-30.717 r270 bottom
VD118 "BAS216" BAS216+ 126.236,-36.305 r270 bottom
VD119 "BAS216" BAS216+ 126.236,-41.385 r270 bottom
VD120 "BAS216" BAS216+ 133.856,-41.385 r270 bottom
VD121 "BAS216" BAS216+ 102.868,-3.031 r270 bottom
VD122 "BAS216" BAS216+ 102.867,-7.857 r270 bottom
VD123 "BAS216" BAS216+ 102.868,-13.191 r270 bottom
VD124 "BAS216" BAS216+ 102.868,-18.271 r270 bottom
VD125 "BAS216" BAS216+ 126.235,-7.857 r270 bottom
VD126 "BAS216" BAS216+ 126.236,-13.191 r270 bottom
VD127 "BAS216" BAS216+ 126.235,-18.525 r270 bottom
VD128 "BAS216" BAS216+ 133.856,-18.525 r270 bottom
VD129 "BAS216" BAS216+ 168.146,-12.937 r270 bottom
VD130 "BAS216" BAS216+ 175.766,-13.445 r270 bottom
VD131 "BAS216" BAS216+ 175.765,-3.285 r270 bottom
VD132 "BAS216" BAS216+ 175.766,-8.619 r270 bottom
VD133 "BAS216" BAS216+ 202.151,-14.207 r270 bottom
VD134 "BAS216" BAS216+ 202.151,-8.873 r270 bottom
VD135 "BAS216" BAS216+ 202.151,-19.541 r270 bottom
VD136 "BAS216" BAS216+ 210.31,-14.207 r270 bottom
VD137 "BAS216" BAS216+ 176.02,-25.891 r270 bottom
VD138 "BAS216" BAS216+ 167.638,-36.305 r270 bottom
VD139 "BAS216" BAS216+ 176.02,-31.225 r270 bottom
VD140 "BAS216" BAS216+ 176.019,-36.559 r270 bottom
VD141 "BAS216" BAS216+ 202.405,-31.225 r270 bottom
VD142 "BAS216" BAS216+ 202.405,-36.813 r270 bottom
VD143 "BAS216" BAS216+ 210.056,-36.559 r270 bottom
VD144 "BAS216" BAS216+ 202.405,-41.385 r270 bottom
VD145 "BAS216" BAS216+ 175.765,-50.021 r270 bottom
VD146 "BAS216" BAS216+ 175.766,-54.847 r270 bottom
VD147 "BAS216" BAS216+ 175.766,-59.927 r270 bottom
VD148 "BAS216" BAS216+ 175.766,-65.007 r270 bottom
VD149 "BAS216" BAS216+ 202.405,-49.513 r270 bottom
VD150 "BAS216" BAS216+ 202.405,-54.847 r270 bottom
VD151 "BAS216" BAS216+ 202.405,-60.181 r270 bottom
VD152 "BAS216" BAS216+ 202.405,-65.007 r270 bottom
VD153 "BAS216" BAS216+ 176.02,-73.389 r270 bottom
VD154 "BAS216" BAS216+ 176.02,-78.215 r270 bottom
VD155 "BAS216" BAS216+ 176.019,-83.549 r270 bottom
VD156 "BAS216" BAS216+ 176.02,-88.375 r270 bottom
VD157 "BAS216" BAS216+ 208.532,-77.707 r90 bottom
VD158 "BAS216" BAS216+ 200.786,-77.961 r90 bottom
VD159 "BAS216" BAS216+ 202.405,-82.279 r270 bottom
VD160 "BAS216" BAS216+ 202.405,-87.359 r270 bottom
VD161 "BAS216" BAS216+ 175.766,-95.233 r270 bottom
VD162 "BAS216" BAS216+ 175.766,-100.313 r270 bottom
VD163 "BAS216" BAS216+ 175.766,-105.901 r270 bottom
VD164 "BAS216" BAS216+ 175.765,-110.981 r270 bottom
VD165 "BAS216" BAS216+ 202.405,-93.963 r270 bottom
VD166 "BAS216" BAS216+ 202.405,-99.297 r270 bottom
VD167 "BAS216" BAS216+ 202.405,-104.631 r270 bottom
VD168 "BAS216" BAS216+ 202.405,-109.711 r270 bottom
VD169 "BAS216" BAS216+ 175.765,-117.926 r270 bottom
VD170 "BAS216" BAS216+ 175.766,-123.514 r270 bottom
VD171 "BAS216" BAS216+ 175.766,-128.594 r270 bottom
VD172 "BAS216" BAS216+ 175.766,-133.674 r270 bottom
VD173 "BAS216" BAS216+ 202.405,-117.672 r270 bottom
VD174 "BAS216" BAS216+ 202.405,-122.752 r270 bottom
VD175 "BAS216" BAS216+ 202.405,-128.086 r270 bottom
VD176 "BAS216" BAS216+ 202.405,-133.166 r270 bottom
VD177 "BAS216" BAS216+ 175.766,-140.786 r270 bottom
VD178 "BAS216" BAS216+ 175.766,-146.374 r270 bottom
VD179 "BAS216" BAS216+ 175.765,-151.454 r270 bottom
VD180 "BAS216" BAS216+ 175.766,-156.534 r270 bottom
VD181 "BAS216" BAS216+ 202.405,-140.532 r270 bottom
VD182 "BAS216" BAS216+ 202.405,-145.612 r270 bottom
VD183 "BAS216" BAS216+ 202.405,-150.946 r270 bottom
VD184 "BAS216" BAS216+ 202.405,-156.026 r270 bottom
VD185 "BAS216" BAS216+ 175.766,-163.646 r270 bottom
VD186 "BAS216" BAS216+ 175.766,-169.234 r270 bottom
VD187 "BAS216" BAS216+ 175.766,-174.314 r270 bottom
VD188 "BAS216" BAS216+ 175.765,-179.394 r270 bottom
VD189 "BAS216" BAS216+ 202.405,-164.662 r270 bottom
VD190 "BAS216" BAS216+ 202.405,-169.742 r270 bottom
VD191 "BAS216" BAS216+ 202.405,-175.076 r270 bottom
VD192 "BAS216" BAS216+ 202.405,-180.156 r270 bottom

## Footprints (in the part's own frame and the unit in brackets; to place one, negate y for a bottom-side part, rotate by r counter-clockwise, add the part's x,y. Pads: shape width x height; smd on the part's side, far side on the other; paste and mask are expansions set on the pad)
BAS216+ [mm]
  rect 0.9x1.4 smd: A(0.4,0.8) K(2.2,0.8)
  silkscreen extent -0.2,0 3.3,1.65
DIN41612 [mm]
  round 1.3 hole 1.1 unplated: 1(86.77,8.04) 2(86.74,5.35) 3(86.77,2.76) 4(84.23,8.04) 5(84.2,5.35) 6(84.23,2.76) 7(81.69,8.04) 8(81.66,5.35) 9(81.69,2.76) 10(79.15,8.04) 11(79.12,5.35) 12(79.15,2.76) 13(76.61,8.04) 14(76.58,5.35) 15(76.61,2.76) 16(74.07,8.04) 17(74.04,5.35) 18(74.07,2.76) 19(71.53,8.04) 20(71.5,5.35) 21(71.53,2.76) 22(68.99,8.04) 23(68.96,5.35) 24(68.99,2.76) 25(66.45,8.04) 26(66.42,5.35) 27(66.45,2.76) 28(63.91,8.04) 29(63.88,5.35) 30(63.91,2.76) 31(61.37,8.04) 32(61.34,5.35) 33(61.37,2.76) 34(58.83,8.04) 35(58.8,5.35) 36(58.83,2.76) 37(56.29,8.04) 38(56.26,5.35) 39(56.29,2.76) 40(53.75,8.04) 41(53.72,5.35) 42(53.75,2.76) 43(51.21,8.04) 44(51.18,5.35) 45(51.21,2.76) 46(48.67,8.04) 47(48.64,5.35) 48(48.67,2.76) 49(46.13,8.04) 50(46.1,5.35) 51(46.13,2.76) 52(43.59,8.04) 53(43.56,5.35) 54(43.59,2.76) 55(41.05,8.04) 56(41.02,5.35) 57(41.05,2.76) 58(38.51,8.04) 59(38.48,5.35) 60(38.51,2.76) 61(35.97,8.04) 62(35.94,5.35) 63(35.97,2.76) 64(33.43,8.04) 65(33.4,5.35) 66(33.43,2.76) 67(30.89,8.04) 68(30.86,5.35) 69(30.89,2.76) 70(28.35,8.04) 71(28.32,5.35) 72(28.35,2.76) 73(25.81,8.04) 74(25.78,5.35) 75(25.81,2.76) 76(23.27,8.04) 77(23.24,5.35) 78(23.27,2.76) 79(20.73,8.04) 80(20.7,5.35) 81(20.73,2.76) 82(18.19,8.04) 83(18.16,5.35) 84(18.19,2.76) 85(15.65,8.04) 86(15.62,5.35) 87(15.65,2.76) 88(13.11,8.04) 89(13.08,5.35) 90(13.11,2.76) 91(10.57,8.04) 92(10.54,5.35) 93(10.57,2.76) 94(8.03,8.04) 95(8,5.25) 96(8.03,2.76)
  round 3 hole 3.2: 97(2.9,10.6) 98(91.9,10.6)
  silkscreen extent 0.5,1.1 94.5,13.4
"PLD 10" [mm]
  rect 1.3x1.3 hole 0.7 square: 1(1.27,1.27) 2(3.81,1.27) 3(6.35,1.27) 4(8.89,1.27) 5(11.43,1.27) 6(11.43,3.81) 7(8.89,3.81) 8(6.35,3.81) 9(3.81,3.81) 10(1.27,3.81)
  silkscreen extent 0,0 12.8,5.1
SOP127P600X175-16N [mm] "SOP, 16-Leads, Body 9,90x3,90mm, Pitch 1,27mm, IPC Medium Density"
  rect 1.85x0.6 smd: 1(-2.5,4.445) 2(-2.5,3.175) 3(-2.5,1.905) 4(-2.5,0.635) 5(-2.5,-0.635) 6(-2.5,-1.905) 7(-2.5,-3.175) 8(-2.5,-4.445) 9(2.5,-4.445) 10(2.5,-3.175) 11(2.5,-1.905) 12(2.5,-0.635) 13(2.5,0.635) 14(2.5,1.905) 15(2.5,3.175) 16(2.5,4.445)
  silkscreen extent -2.62,-5 1.17,5.42, body extent -2,-5 2,5, height 1.75
TTR-реле [mm]
  rrect80% 2x1.524 hole 0.85: 1(1.9,2.5) 1(1.905,2.54) 1(1.905,2.54) 3(6.96,2.5) 5(12.04,2.54) 7(17.12,2.54)
  silkscreen extent 0,0 19,5

## Part data
D0 D1 D2 D3 D4 D5 D6 D7 D8 D9 D10 D11 D12 D13 D14 D15 D16 D17 D18 D19 D20 D21 D22 D23: library part Component_1, "Deshifrator"
K1 K2 K3 K4 K5 K6 K7 K8 K9 K10 K11 K12 K13 K14 K15 K16 K17 K18 K19 K20 K21 K22 K23 K24 K25 K26 K27 K28 K29 K30 K31 K32 K33 K34 K35 K36 K37 K38 K39 K40 K41 K42 K43 K44 K45 K46 K47 K48 K49 K50 K51 K52 K53 K54 K55 K56 K57 K58 K59 K60 K61 K62 K63 K64 K65 K66 K67 K68 K69 K70 K71 K72 K73 K74 K75 K76 K77 K78 K79 K80 K81 K82 K83 K84 K85 K86 K87 K88 K89 K90 K91 K92 K93 K94 K95 K96 K97 K98 K99 K100 K101 K102 K103 K104 K105 K106 K107 K108 K109 K110 K111 K112 K113 K114 K115 K116 K117 K118 K119 K120 K121 K122 K123 K124 K125 K126 K127 K128 K129 K130 K131 K132 K133 K134 K135 K136 K137 K138 K139 K140 K141 K142 K143 K144 K145 K146 K147 K148 K149 K150 K151 K152 K153 K154 K155 K156 K157 K158 K159 K160 K161 K162 K163 K164 K165 K166 K167 K168 K169 K170 K171 K172 K173 K174 K175 K176 K177 K178 K179 K180 K181 K182 K183 K184 K185 K186 K187 K188 K189 K190 K191 K192: library part TRR1A05D00
L1: library part DIN41612
VD1 VD2 VD3 VD4 VD5 VD6 VD7 VD8 VD9 VD10 VD11 VD12 VD13 VD14 VD15 VD16 VD17 VD18 VD19 VD20 VD21 VD22 VD23 VD24 VD25 VD26 VD27 VD28 VD29 VD30 VD31 VD32 VD33 VD34 VD35 VD36 VD37 VD38 VD39 VD40 VD41 VD42 VD43 VD44 VD45 VD46 VD47 VD48 VD49 VD50 VD51 VD52 VD53 VD54 VD55 VD56 VD57 VD58 VD59 VD60 VD61 VD62 VD63 VD64 VD65 VD66 VD67 VD68 VD69 VD70 VD71 VD72 VD73 VD74 VD75 VD76 VD77 VD78 VD79 VD80 VD81 VD82 VD83 VD84 VD85 VD86 VD87 VD88 VD89 VD90 VD91 VD92 VD93 VD94 VD95 VD96 VD97 VD98 VD99 VD100 VD101 VD102 VD103 VD104 VD105 VD106 VD107 VD108 VD109 VD110 VD111 VD112 VD113 VD114 VD115 VD116 VD117 VD118 VD119 VD120 VD121 VD122 VD123 VD124 VD125 VD126 VD127 VD128 VD129 VD130 VD131 VD132 VD133 VD134 VD135 VD136 VD137 VD138 VD139 VD140 VD141 VD142 VD143 VD144 VD145 VD146 VD147 VD148 VD149 VD150 VD151 VD152 VD153 VD154 VD155 VD156 VD157 VD158 VD159 VD160 VD161 VD162 VD163 VD164 VD165 VD166 VD167 VD168 VD169 VD170 VD171 VD172 VD173 VD174 VD175 VD176 VD177 VD178 VD179 VD180 VD181 VD182 VD183 VD184 VD185 VD186 VD187 VD188 VD189 VD190 VD191 VD192: library part Диод

## Free pads (board coordinates)
  round 3 hole 3.2: 0(4.9,-188.2) 1(229.9,-188.2) 2(229.9,-8.2) 3(4.9,-8.2)

## Via types
v1: diameter 0.6, hole 0.3, Top Layer to Bottom Layer, 292 vias
v2: diameter 0.7, hole 0.3, Top Layer to Bottom Layer, 5 vias